# Altium PCB 4501-WB_AV_BMS.PcbDoc (part 2 of 2)
Units mm, origin at the board's own origin, x right, y up, seen from the top; angles counter-clockwise.
Board outline 95.46 x 71.36 mm, 2 copper layers (Top Layer, Bottom Layer), stack 1.671 mm thick; 104 components, 89 nets, 330 pads, 251 vias.
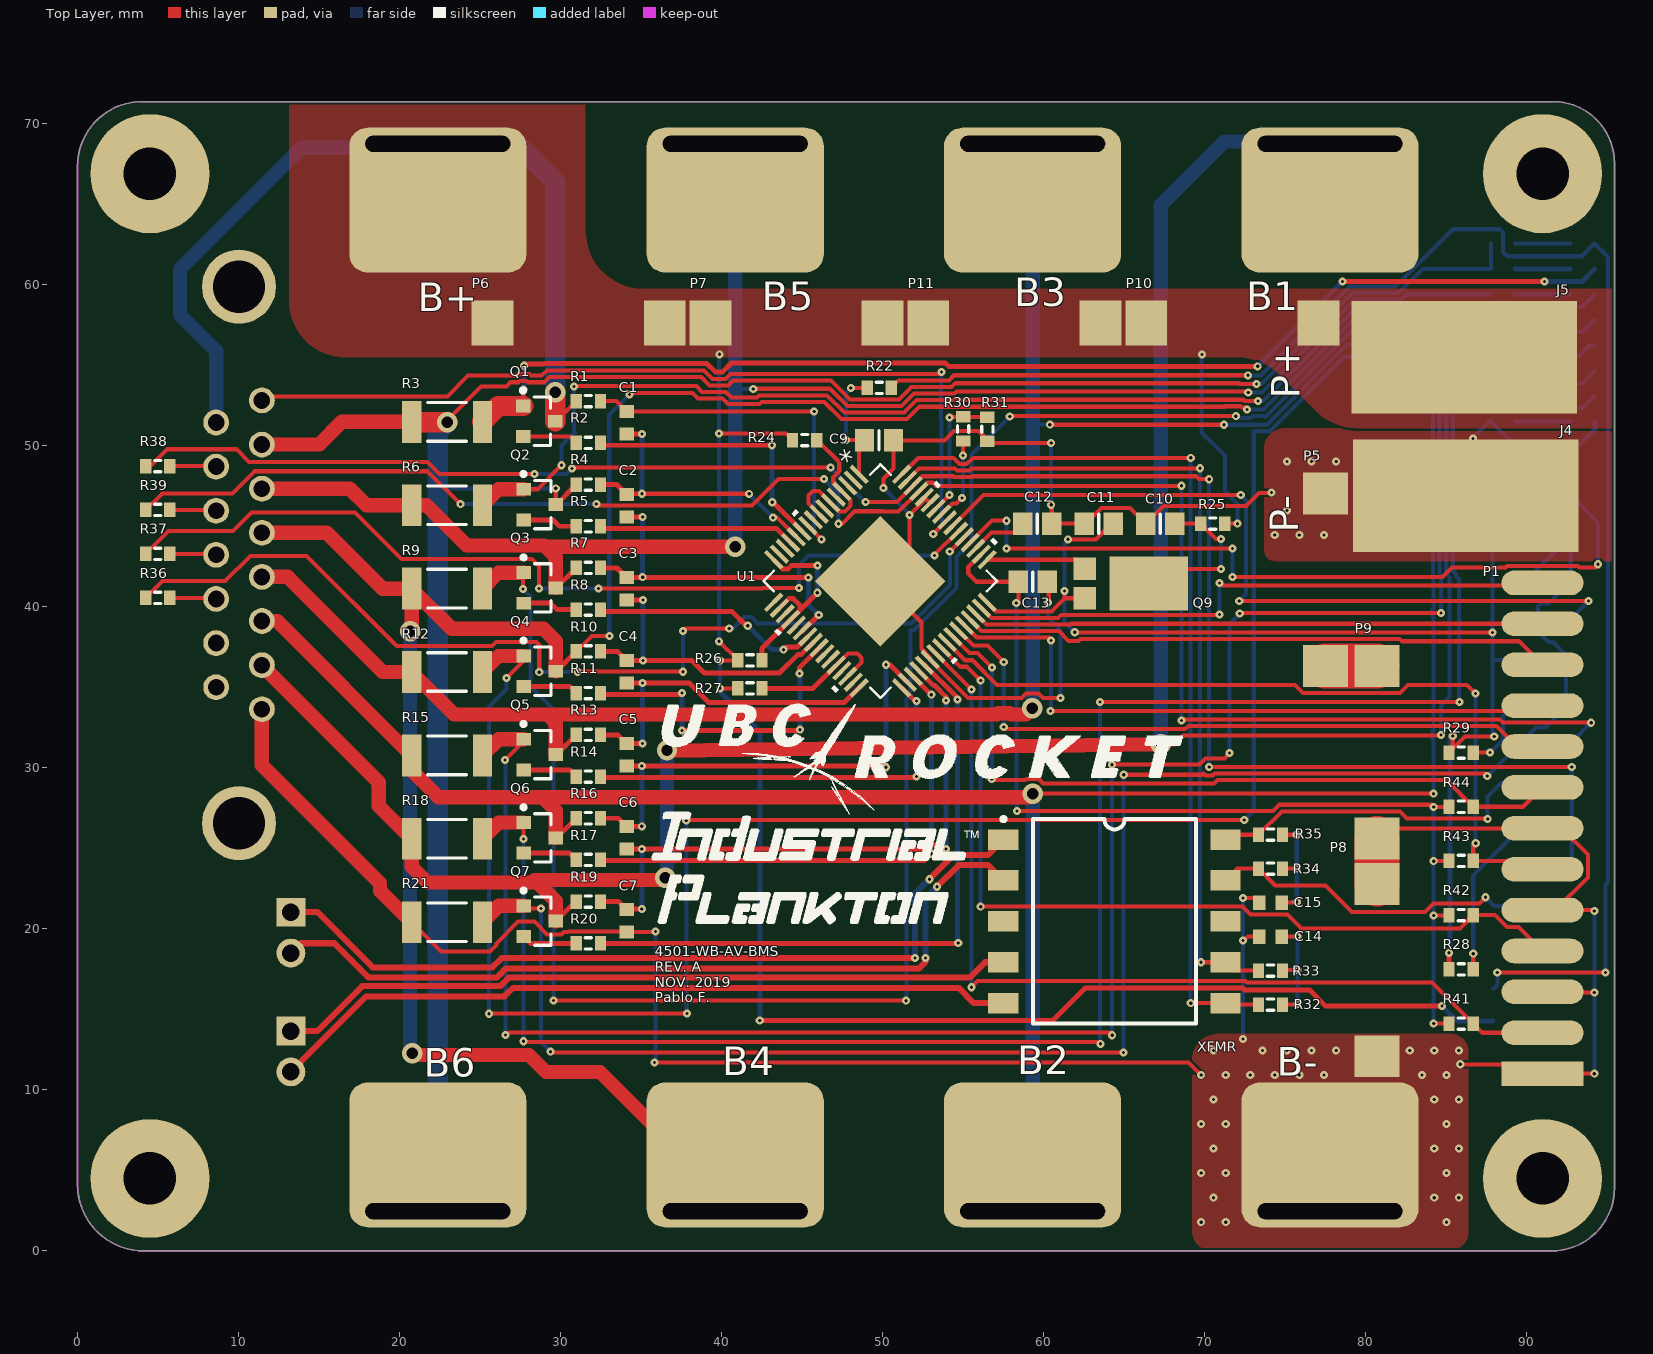
[diagram p0: Top Layer view]

## Keep-outs (continued)
Keep-Out Layer: (continued)
  lines w0.025: -0.011,67.355 cw(c4.011,67.355) 4.01,71.377 ; -0.011,67.355 -0.011,67.355 ; -0.011,67.355 -0.011,4.113 ccw(c4.115,4.113) 4.115,-0.013 ; 4.011,71.351 ccw(c4.011,71.364) 4.011,71.351 ; 4.011,71.351 ccw(c4.011,67.355) 0.014,67.355 0.014,4.113 ccw(c4.115,4.113) 4.115,0.013 ; 4.011,71.351 91.656,71.351 ; 4.011,71.351 4.011,71.351 ; 4.011,71.377 ccw(c4.011,71.364) 4.01,71.377 ; 4.011,71.377 ccw(c4.011,67.355) 4.01,71.377 ; 4.011,71.377 91.656,71.377 ; 4.115,-0.013 91.567,-0.013 ccw(c91.567,3.899) 95.479,3.898 ; 4.115,-0.013 4.115,-0.013 ; 4.115,0.013 91.567,0.013 ccw(c91.567,3.899) 95.453,3.899 ; 4.115,0.013 4.115,0.013 ; 91.656,71.351 ccw(c91.656,71.364) 91.656,71.351 ; 91.656,71.351 cw(c91.656,67.554) 95.453,67.554 ; 91.656,71.351 91.656,71.351 ; 91.656,71.377 ccw(c91.656,67.554) 91.656,71.377 ; 91.656,71.377 cw(c91.656,67.554) 95.479,67.554 ; 91.656,71.377 ccw(c91.656,71.364) 91.656,71.377 ; 95.453,3.899 ccw(c95.466,3.899) 95.453,3.899 ; 95.453,3.899 95.453,67.554 ; 95.453,3.899 95.453,3.899 ; 95.453,67.554 cw(c95.466,67.554) 95.453,67.554 ; 95.453,67.554 95.453,67.554 ; 95.479,3.898 ccw(c95.466,3.899) 95.479,3.899 ; 95.479,3.898 ccw(c91.567,3.899) 95.479,3.899 ; 95.479,3.899 ccw(c95.466,3.899) 95.479,3.899 ; 95.479,3.899 95.479,67.554 ; 95.479,67.554 ccw(c95.466,67.554) 95.479,67.554 ; 95.479,67.554 ccw(c91.656,67.554) 95.479,67.554

## Silkscreen, mask and mechanical layers (free items; w line width, h text height)
Top Overlay:
  drawing of 58 lines, arcs and shapes, not listed
  text "B3" at 58.186,58.654 h1.78
  text "B1" at 72.603,58.428 h1.78
  text "B5" at 42.487,58.4 h1.78
  text "B+" at 21.133,58.356 h1.78
  text "P+" at 75.918,52.918 h1.78 r90
  text "P-" at 75.822,44.585 h1.78 r90
  text "4501-WB-AV-BMS / REV. A / NOV. 2019 / Pablo F." at 35.857,15.425 h0.64
  text "B2" at 58.362,10.96 h1.78
  text "B4" at 40.046,10.912 h1.78
  text "B-" at 74.493,10.866 h1.78
  text "B6" at 21.516,10.82 h1.78
Bottom Overlay:
  text "B+" at 31.549,68.976 h1.78
  text "B5" at 50.391,68.976 h1.78
  text "B3" at 68.816,68.781 h1.78
  text "B1" at 86.446,68.506 h1.78
  text "On" at 91.45,62.21 h0.64
  text "B7" at 91.45,60.631 h0.64
  text "B6" at 91.45,59.052 h0.64
  text "B5" at 91.45,57.473 h0.64
  text "B4" at 91.45,55.895 h0.64
  text "B3" at 91.45,54.316 h0.64
  text "B2" at 91.45,52.737 h0.64
  text "B1" at 91.45,51.158 h0.64
  text "B-" at 86.223,2.471 h1.78 r180
  text "B6" at 31.859,1.12 h1.78
  text "B4" at 50.221,0.975 h1.78
  text "B2" at 68.631,0.77 h1.78

## Text inside footprints (layer, text, board x,y; h text height)
U1: Top Overlay "*" at 46.772,49.045 h1.27 r315; Mechanical 13 "*" at 48.757,47.463 h1.27 r315